# Altium PCB CT9042 Front Board.PcbDoc (part 1 of 2)
Units mm, origin at the board's own origin, x right, y up, seen from the top; angles counter-clockwise.
Board outline 238.25 x 69.25 mm, 4 copper layers (Top Layer, Layer 1, Layer 2, Bottom Layer), stack 1.794 mm thick; 120 components, 105 nets, 430 pads, 140 vias.
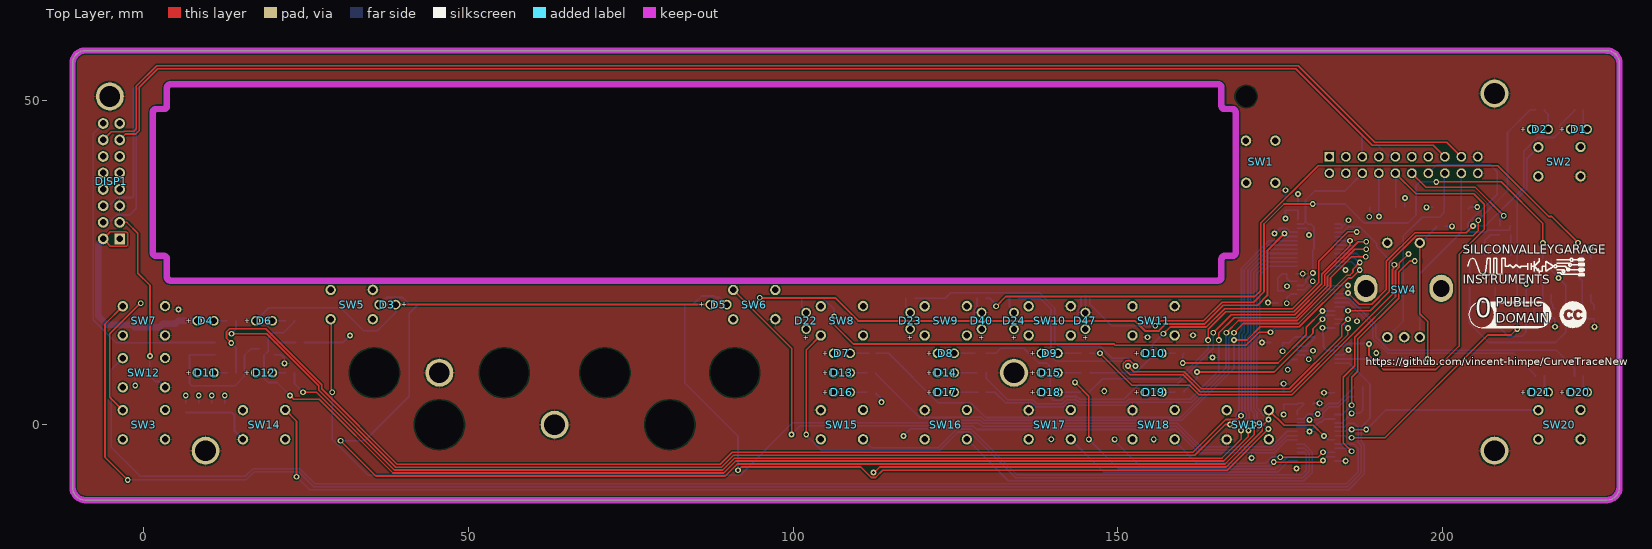
[diagram p0: Top Layer view]
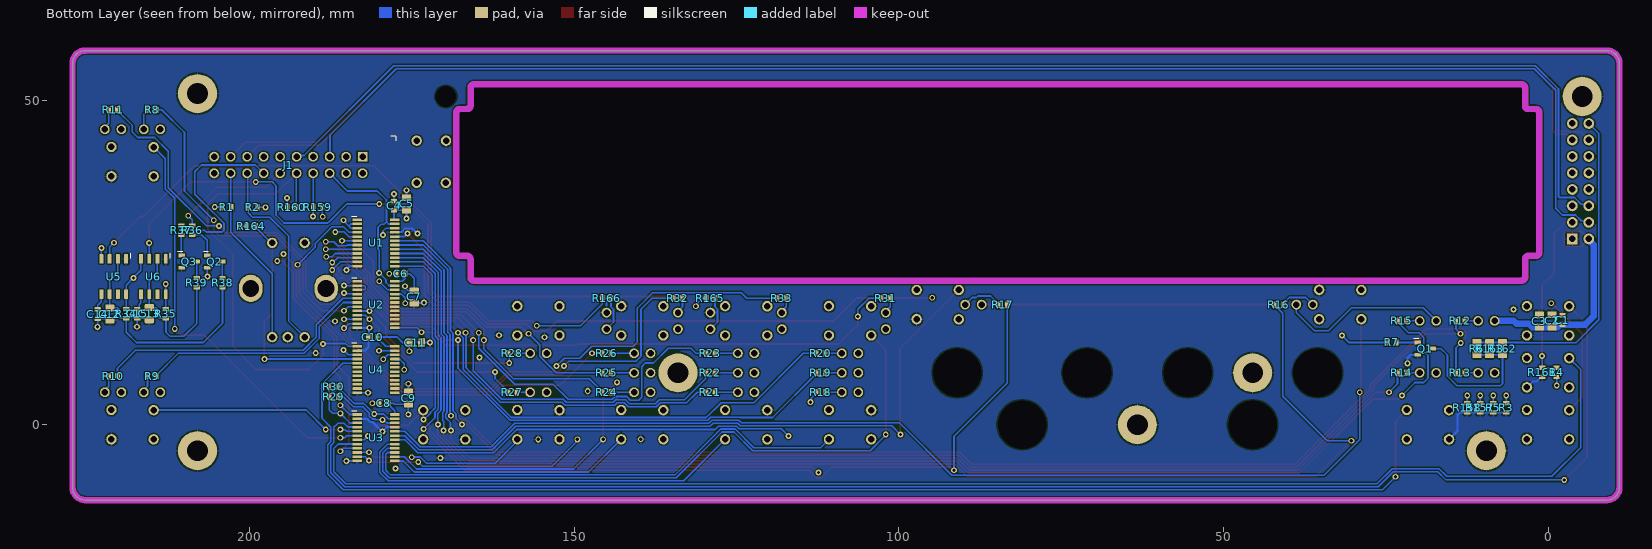
[diagram p1: Bottom Layer view, seen from below]
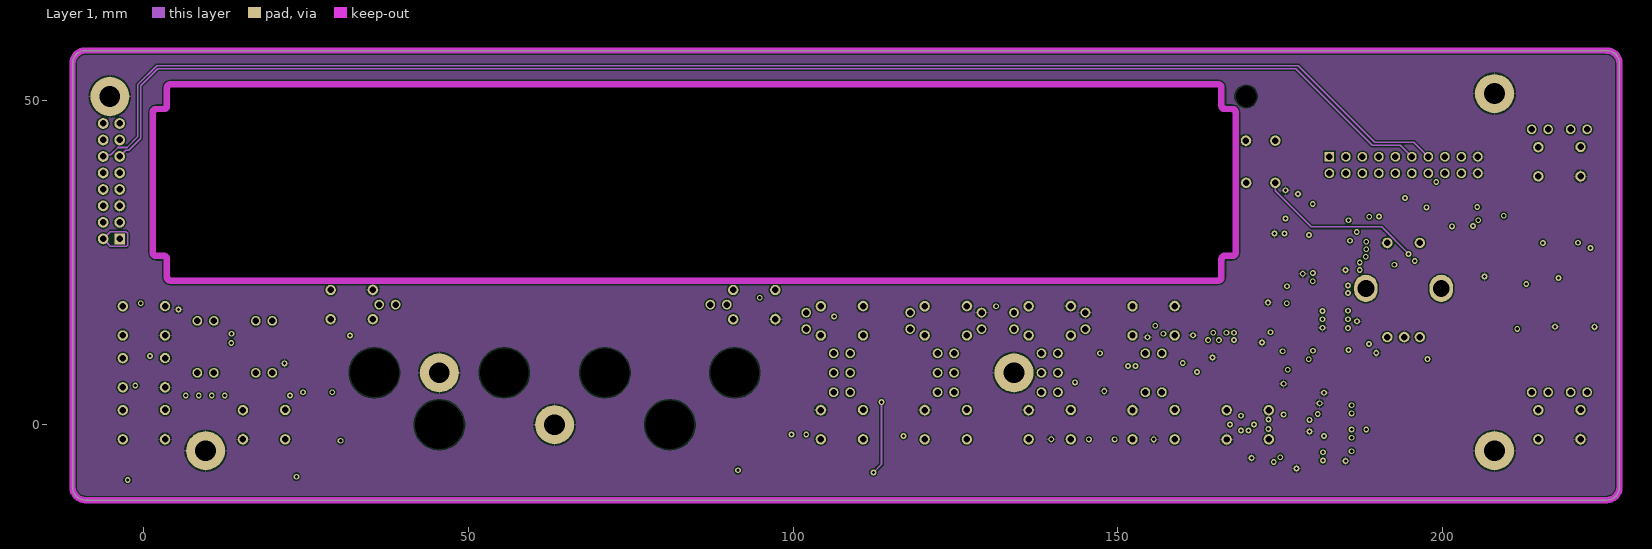
[diagram p2: Layer 1]
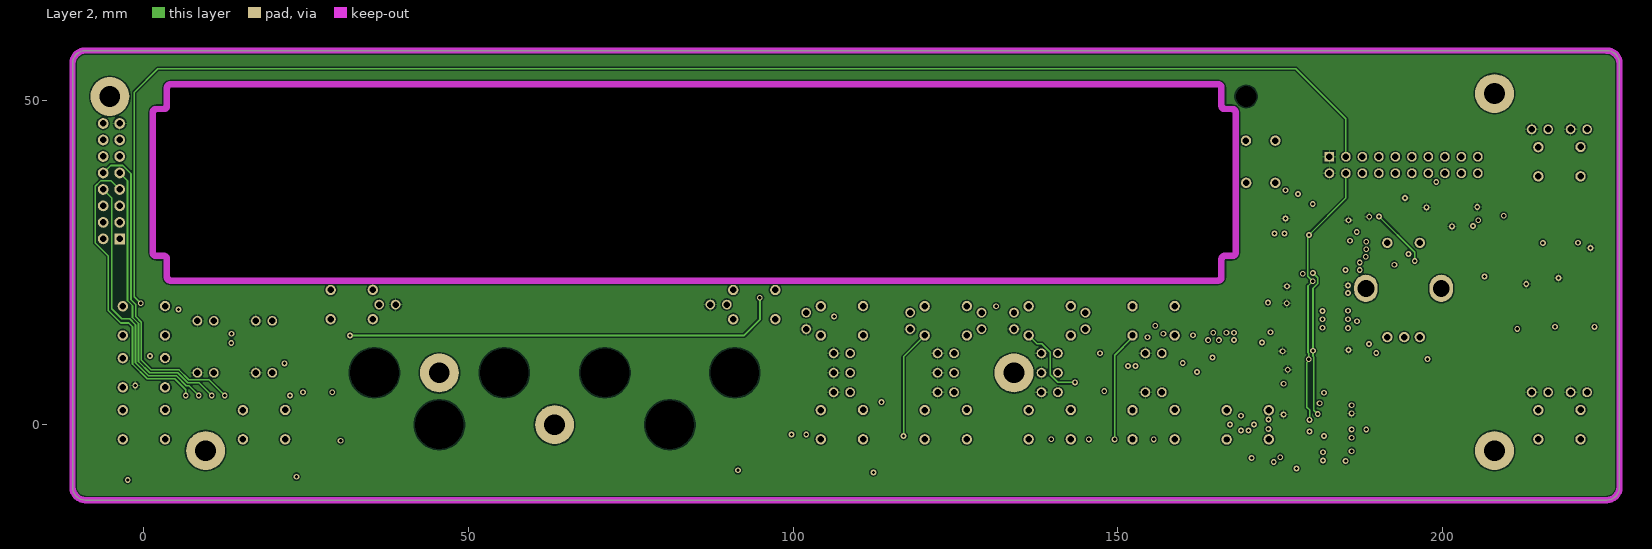
[diagram p3: Layer 2]
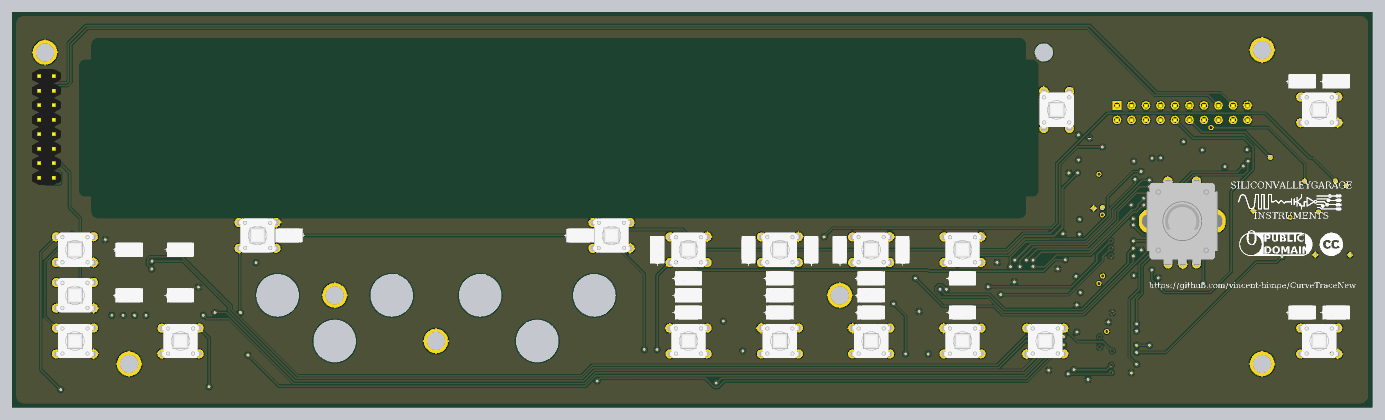
[diagram p5: 3D render of the assembled board from above, using the file's embedded part models]
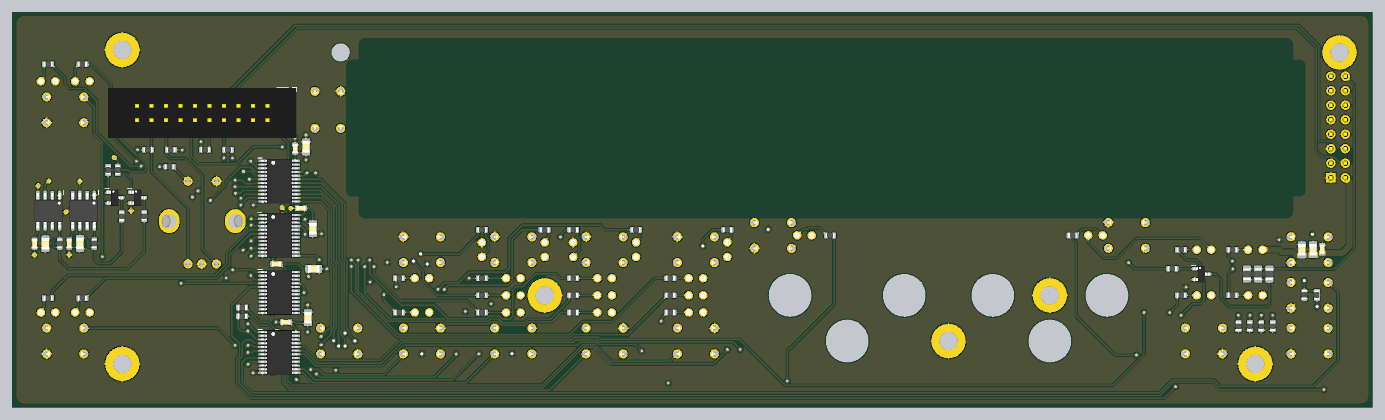
[diagram p6: 3D render of the assembled board from below, using the file's embedded part models]

## Layer stack, top to bottom
Top Solder: solder mask 0.0102, Solder Resist, Dk 3.5
Top Layer: signal copper 0.0356
Dielectric 2: prepreg 0.1016, Core-009, Dk 4.5
Layer 1: signal copper 0.035
Dielectric 1: dielectric 1.45, FR-4, Dk 4.8
Layer 2: signal copper 0.035
Dielectric 3: prepreg 0.1016, Core-009, Dk 4.5
Bottom Layer: signal copper 0.0356
Bottom Solder: solder mask 0.0102, Solder Resist, Dk 3.5

## Board outline
-10.662,-10.727 -10.847,-10.381 -10.96,-10.006 -10.999,-9.616 -10.999,55.634 -10.96,56.024 -10.847,56.399 -10.662,56.745 -10.413,57.048 -10.11,57.297 -9.764,57.482 -9.389,57.596 -8.999,57.634 225.251,57.634 225.641,57.596 226.016,57.482 226.362,57.297 226.665,57.048 226.914,56.745 227.099,56.399 227.213,56.024 227.251,55.634 227.251,-9.616 227.213,-10.006 227.099,-10.381 226.914,-10.727 226.665,-11.03 226.362,-11.279 226.016,-11.464 225.641,-11.578 225.251,-11.616 -8.999,-11.616 -9.389,-11.578 -9.764,-11.464 -10.11,-11.279 -10.413,-11.03
cut-out: 3.551,22.709 3.55,25.493 ccw(c3.05,25.493) 3.05,25.993 1.875,25.993 cw(c1.875,26.493) 1.375,26.493 1.375,48.125 cw(c1.875,48.125) 1.875,48.625 3.05,48.625 ccw(c3.05,49.125) 3.55,49.125 3.55,51.909 3.551,51.909 cw(c4.051,51.909) 4.051,52.409 165.451,52.409 cw(c165.451,51.909) 165.951,51.909 165.952,51.909 165.952,49.125 ccw(c166.452,49.125) 166.452,48.625 167.627,48.625 cw(c167.627,48.125) 168.127,48.125 168.127,26.493 cw(c167.627,26.493) 167.627,25.993 166.452,25.993 ccw(c166.452,25.493) 165.952,25.493 165.952,22.709 165.951,22.709 cw(c165.451,22.709) 165.451,22.209 4.051,22.209 cw(c4.051,22.709)

## Design rules (kind name [scope] priority, off if disabled: settings)
Clearance [All] p1: gap=0.2 ignorepadtopadclearanceinfootprint=FALSE
ComponentClearance [All] p1 off: gap=0.254 collisioncheckmode=3 verticalgap=0.254 showdistances=FALSE
Height [All] p1 off: minheight=0 maxheight=25.4 prefheight=12.7
HoleSize [All] p1: absolutevalues=TRUE maxlimit=10 minlimit=0.1 maxpercent=80.000 minpercent=20.000
MinimumSolderMaskSliver [All] p1: minsoldermaskwidth=0.1
PolygonConnect [All] p1: connectstyle=Relief reliefconductorwidth=0.254 reliefentries=4 polygonreliefangle="90 Angle" airgapwidth=0.254
RoutingVias [All] p1: holewidth=0.5 width=0.9 viastyle="Through Hole" minholewidth=0.5 minwidth=0.9 maxholewidth=0.5 maxwidth=0.9
SolderMaskExpansion [All] p1: expansion=0.102 istentingtop=FALSE
SupplyNets "Schematic Supply Nets" [InNet('FGND')] p1: voltage=0.000
SupplyNets "Schematic Supply Nets_1" [InNet('FP5VD')] p2: voltage=0.000
Width [All] p1: maxlimit=2 minlimit=0.2 preferedwidth=0.25
26 further rules are at their usual default settings.

## Components (designator, comment, footprint, x,y, rotation, side; value= is the part's Value field where it differs from the comment)
C1 "CAP0603" CAPC0603 -2.22,16.12 r90 bottom
C2 "CAP0805" CAPC0805 -0.625,16 r90 bottom
C3 "CAP0805" CAPC0805 1.35,15.975 r90 bottom
C4 "CAP0603" CAPC0603 177.737,33.71 r90 bottom
C5 "CAP0805" CAPC0805 175.807,34 r90 bottom
C6 "CAP0603" CAPC0603 176.7,23.275 r0 bottom
C7 "CAP0805" CAPC0805 174.625,19.675 r270 bottom
C8 "CAP0603" CAPC0603 179.326,3.302 r0 bottom
C9 "CAP0805" CAPC0805 175.49,4.09 r90 bottom
C10 "CAP0603" CAPC0603 181,13.5 r0 bottom
C11 "CAP0805" CAPC0805 174.454,12.648 r180 bottom
C12 "CAP0805" CAPC0805 221.5,17.05 r270 bottom
C13 "CAP0805" CAPC0805 215.425,17.1 r270 bottom
C14 "CAP0603" CAPC0603 223.375,17.05 r270 bottom
C15 "CAP0603" CAPC0603 217.3,17.075 r270 bottom
D1 "LED-SUNLED-XLUY13D" LED-SUNLED-XLUY13D 221,45.5 r0 top locked
D2 "LED-SUNLED-XLUY13D" LED-SUNLED-XLUY13D 215,45.5 r0 top locked
D3 "LED-SUNLED-XLUY13D" LED-SUNLED-XLUY13D 37.5,18.5 r180 top locked
D4 "LED-SUNLED-XLUY13D" LED-SUNLED-XLUY13D 9.5,16 r0 top locked
D5 "LED-SUNLED-XLUY13D" LED-SUNLED-XLUY13D 88.5,18.5 r0 top locked
D6 "LED-SUNLED-XLUY13D" LED-SUNLED-XLUY13D 18.5,16 r0 top locked
D7 "LED-SUNLED-XLUY13D" LED-SUNLED-XLUY13D 107.5,11 r0 top locked
D8 "LED-SUNLED-XLUY13D" LED-SUNLED-XLUY13D 123.5,11 r0 top locked
D9 "LED-SUNLED-XLUY13D" LED-SUNLED-XLUY13D 139.5,11 r0 top locked
D10 "LED-SUNLED-XLUY13D" LED-SUNLED-XLUY13D 155.5,11 r0 top locked
D11 "LED-SUNLED-XLUY13D" LED-SUNLED-XLUY13D 9.5,8 r0 top locked
D12 "LED-SUNLED-XLUY13D" LED-SUNLED-XLUY13D 18.5,8 r0 top locked
D13 "LED-SUNLED-XLUY13D" LED-SUNLED-XLUY13D 107.5,8 r0 top locked
D14 "LED-SUNLED-XLUY13D" LED-SUNLED-XLUY13D 123.5,8 r0 top locked
D15 "LED-SUNLED-XLUY13D" LED-SUNLED-XLUY13D 139.5,8 r0 top locked
D16 "LED-SUNLED-XLUY13D" LED-SUNLED-XLUY13D 107.5,5 r0 top locked
D17 "LED-SUNLED-XLUY13D" LED-SUNLED-XLUY13D 123.5,5 r0 top locked
D18 "LED-SUNLED-XLUY13D" LED-SUNLED-XLUY13D 139.5,5 r0 top locked
D19 "LED-SUNLED-XLUY13D" LED-SUNLED-XLUY13D 155.5,5 r0 top locked
D20 "LED-SUNLED-XLUY13D" LED-SUNLED-XLUY13D 221,5 r0 top locked
D21 "LED-SUNLED-XLUY13D" LED-SUNLED-XLUY13D 215,5 r0 top locked
D22 "LED-SUNLED-XLUY13D" LED-SUNLED-XLUY13D 102,16 r90 top locked
D23 "LED-SUNLED-XLUY13D" LED-SUNLED-XLUY13D 118,16 r90 top locked
D24 "LED-SUNLED-XLUY13D" LED-SUNLED-XLUY13D 134,16 r90 top locked
D40 "LED-SUNLED-XLUY13D" LED-SUNLED-XLUY13D 129,16 r90 top locked
D47 "LED-SUNLED-XLUY13D" LED-SUNLED-XLUY13D 145,16 r90 top locked
DISP1 "DISPLAY-LCD-2X40" CONNECTOR-GENERIC-PINHEADER-2X8 -5,37.5 r90 top
J1 "BOXHEADER-10X2" "CONNECTOR GENERIC-BOXHEADER-2X10" 194,40 r270 bottom
Q1 "MMBT2222" SOT23 18.925,11.725 r180 bottom
Q2 "MMBT2222" SOT23 205.325,25.125 r180 bottom
Q3 "MMBT2222" SOT23 209.3,25.125 r180 bottom
R1 "RESC0603" RESC0603 203.5,33.5 r0 bottom value=10K
R2 "RESC0603" RESC0603 199.5,33.5 r180 bottom value=10K
R3 "RESC0603" RESC0603 6.45,2.6 r270 bottom value=470R
R4 "RESC0603" RESC0603 -1.3,8.075 r270 bottom value=10K
R5 "RESC0603" RESC0603 8.45,2.6 r270 bottom value=470R
R6 "RESC0805" RESC0805 10.95,11.725 r90 bottom
R7 "RESC0603" RESC0603 24.05,12.675 r0 bottom value=1K
R8 "RESC0603" RESC0603 215,48.5 r180 bottom value=470R
R9 "RESC0603" RESC0603 215,7.5 r180 bottom value=470R
R10 "RESC0603" RESC0603 221,7.5 r180 bottom value=470R
R11 "RESC0603" RESC0603 221,48.5 r180 bottom value=470R
R12 "RESC0603" RESC0603 13.5,16 r0 bottom value=470R
R13 "RESC0603" RESC0603 13.5,8 r0 bottom value=470R
R14 "RESC0603" RESC0603 22.5,8 r0 bottom value=470R
R15 "RESC0603" RESC0603 22.5,16 r0 bottom value=470R
R16 "RESC0603" RESC0603 41.5,18.5 r0 bottom value=470R
R17 "RESC0603" RESC0603 84,18.5 r180 bottom value=470R
R18 "RESC0603" RESC0603 112,5 r0 bottom value=470R
R19 "RESC0603" RESC0603 112,8 r0 bottom value=470R
R20 "RESC0603" RESC0603 112,11 r0 bottom value=470R
R21 "RESC0603" RESC0603 129,5 r0 bottom value=470R
R22 "RESC0603" RESC0603 129,8 r0 bottom value=470R
R23 "RESC0603" RESC0603 129,11 r0 bottom value=470R
R24 "RESC0603" RESC0603 145,5 r0 bottom value=470R
R25 "RESC0603" RESC0603 145,8 r0 bottom value=470R
R26 "RESC0603" RESC0603 145,11 r0 bottom value=470R
R27 "RESC0603" RESC0603 159.5,5 r0 bottom value=470R
R28 "RESC0603" RESC0603 159.5,11 r0 bottom value=470R
R29 "RESC0603" RESC0603 187,4.325 r0 bottom value=10K
R30 "RESC0603" RESC0603 187,5.875 r0 bottom value=10K
R31 "RESC0603" RESC0603 102,19.5 r0 bottom value=470R
R32 "RESC0603" RESC0603 134,19.5 r0 bottom value=470R
R33 "RESC0603" RESC0603 118,19.5 r0 bottom value=470R
R34 "RESC0603" RESC0603 218.975,17.075 r90 bottom value=10K
R35 "RESC0603" RESC0603 212.9,17.075 r90 bottom value=10K
R36 "RESC0603" RESC0603 208.825,29.975 r90 bottom value=470R
R37 "RESC0603" RESC0603 210.475,29.95 r90 bottom value=470R
R38 "RESC0603" RESC0603 204.15,21.875 r270 bottom value=470R
R39 "RESC0603" RESC0603 208.125,21.85 r270 bottom value=470R
R157 "RESC0603" RESC0603 10.45,2.6 r270 bottom value=470R
R158 "RESC0603" RESC0603 12.45,2.6 r270 bottom value=470R
R159 "RESC0603" RESC0603 189.5,33.5 r180 bottom value=10K
R160 "RESC0603" RESC0603 193.5,33.5 r0 bottom value=10K
R161 "RESC0603" RESC0603 0.9,8.1 r90 bottom value=470R
R162 "RESC0805" RESC0805 7.025,11.725 r90 bottom
R163 "RESC0805" RESC0805 9,11.725 r90 bottom
R164 "RESC0603" RESC0603 199.725,30.55 r0 bottom value=10K
R165 "RESC0603" RESC0603 129,19.5 r0 bottom value=470R
R166 "RESC0603" RESC0603 145,19.5 r0 bottom value=470R
SW1 "SWITCH-E-SWITCH-TL1105SFP" SWITCH-ESWITCH-TL1105SPF-1RCAP 172,40.5 r90 top
SW2 "SWITCH-E-SWITCH-TL1105SFP" SWITCH-ESWITCH-TL1105SPF-1RCAP 218,40.5 r0 top locked
SW3 "SWITCH-E-SWITCH-TL1105SFP" SWITCH-ESWITCH-TL1105SPF-1RCAP 0.001,0 r0 top
SW4 "PEC12R-XX" SWITCH-BOURNS-PEC12R-4120F-S0012 194,21 r0 top locked
SW5 "SWITCH-E-SWITCH-TL1105SFP" SWITCH-ESWITCH-TL1105SPF-1RCAP 32,18.5 r0 top locked
SW6 "SWITCH-E-SWITCH-TL1105SFP" SWITCH-ESWITCH-TL1105SPF-1RCAP 94,18.5 r180 top locked
SW7 "SWITCH-E-SWITCH-TL1105SFP" SWITCH-ESWITCH-TL1105SPF-1RCAP 0,16 r0 top locked
SW8 "SWITCH-E-SWITCH-TL1105SFP" SWITCH-ESWITCH-TL1105SPF-1RCAP 107.5,16 r0 top locked
SW9 "SWITCH-E-SWITCH-TL1105SFP" SWITCH-ESWITCH-TL1105SPF-1RCAP 123.5,16 r0 top locked
SW10 "SWITCH-E-SWITCH-TL1105SFP" SWITCH-ESWITCH-TL1105SPF-1RCAP 139.5,16 r0 top locked
SW11 "SWITCH-E-SWITCH-TL1105SFP" SWITCH-ESWITCH-TL1105SPF-1RCAP 155.5,16 r0 top locked
SW12 "SWITCH-E-SWITCH-TL1105SFP" SWITCH-ESWITCH-TL1105SPF-1RCAP 0,8 r0 top locked
SW14 "SWITCH-E-SWITCH-TL1105SFP" SWITCH-ESWITCH-TL1105SPF-1RCAP 18.5,0 r0 top locked
SW15 "SWITCH-E-SWITCH-TL1105SFP" SWITCH-ESWITCH-TL1105SPF-1RCAP 107.5,0 r0 top locked
SW16 "SWITCH-E-SWITCH-TL1105SFP" SWITCH-ESWITCH-TL1105SPF-1RCAP 123.5,0 r0 top locked
SW17 "SWITCH-E-SWITCH-TL1105SFP" SWITCH-ESWITCH-TL1105SPF-1RCAP 139.5,0 r0 top locked
SW18 "SWITCH-E-SWITCH-TL1105SFP" SWITCH-ESWITCH-TL1105SPF-1RCAP 155.5,0 r0 top locked
SW19 "SWITCH-E-SWITCH-TL1105SFP" SWITCH-ESWITCH-TL1105SPF-1RCAP 170,0 r180 top locked
SW20 "SWITCH-E-SWITCH-TL1105SFP" SWITCH-ESWITCH-TL1105SPF-1RCAP 218,0 r0 top locked
U1 "PCAL9555" SO65P640X120-24N 180.5,28 r180 bottom
U2 "PCAL9555" SO65P640X120-24N 180.5,18.5 r180 bottom
U3 "PCAL9555" SO65P640X120-24N 180.5,-2 r180 bottom locked
U4 "PCAL9555" SO65P640X120-24N 180.5,8.5 r180 bottom
U5 "TLC555" SO127P600-8N 220.9,22.825 r270 bottom
U6 "TLC555" SO127P600-8N 214.8,22.825 r270 bottom

## Footprints (in the part's own frame and the unit in brackets; to place one, negate y for a bottom-side part, rotate by r counter-clockwise, add the part's x,y. Pads: shape width x height; smd on the part's side, far side on the other; paste and mask are expansions set on the pad)
CAPC0603 [mm] "CAPACITOR, CHIP 0603 (1608) 0.5MM THICK"
  rrect25% 0.72x0.99 smd paste+0 mask+0.075: 1(-0.69,0) 2(0.69,0)
  body extent -0.81,-0.41 0.81,0.41, height 0.51
CAPC0805 [mm] "CAPACITOR, CHIP 0805 (2012) 0.85MM THICK"
  rrect25% 1.05x1.4 smd paste+0 mask+0.075: 1(-0.95,0) 2(0.95,0)
  body extent -1.01,-0.63 1.01,0.64, height 0.86
"CONNECTOR GENERIC-BOXHEADER-2X10" [mm] "CONNECTOR GENERIC-BOXHEADER-2X10"
  rect 1.5x1.5 hole 1 mask+0.075: 1(-1.27,11.43)
  round 1.5 hole 1 mask+0.075: 2(1.27,11.43) 3(-1.27,8.89) 4(1.27,8.89) 5(-1.27,6.35) 6(1.27,6.35) 7(-1.27,3.81) 8(1.27,3.81) 9(-1.27,1.27) 10(1.27,1.27) 11(-1.27,-1.27) 12(1.27,-1.27) 13(-1.27,-3.81) 14(1.27,-3.81) 15(-1.27,-6.35) 16(1.27,-6.35) 17(-1.27,-8.89) 18(1.27,-8.89) 19(-1.27,-11.43) 20(1.27,-11.43)
  silkscreen extent -4.45,15.76 -3.7,16.51, body extent -4.45,-16.51 4.45,16.51, height 8.81
CONNECTOR-GENERIC-PINHEADER-2X8 [mm] "CONNECTOR GENERIC-PINHEADER-2X8"
  rect 1.65x1.65 hole 1 mask+0.1: 1(-8.883,-1.258)
  round 1.65 hole 1 mask+0.1: 2(-8.883,1.282) 3(-6.343,-1.258) 4(-6.343,1.282) 5(-3.803,-1.258) 6(-3.803,1.282) 7(-1.263,-1.258) 8(-1.263,1.282) 9(1.277,-1.258) 10(1.277,1.282) 11(3.817,-1.258) 12(3.817,1.282) 13(6.357,-1.258) 14(6.357,1.282) 15(8.897,-1.258) 16(8.897,1.282)
  body extent -10.16,-2.54 10.16,2.54, height 9.26
LED-SUNLED-XLUY13D [mm] "LED.YELLOW,DIFFUSED,FLAT TOP,2MM LENS,RECTANGLE BODY"
  round 1.5 hole 1: 1(1.27,0) 2(-1.27,0)
  body extent -2.4,-1.26 2.4,1.25, height 10.05
RESC0603 [mm] "RESISTOR, CHIP 0603 (1608)"
  rrect25% 0.72x0.99 smd paste+0 mask+0.075: 1(-0.69,0) 2(0.69,0)
  body extent -0.8,-0.4 0.8,0.4, height 0.37
RESC0805 [mm] "RESISTOR, CHIP 0805 (2012)"
  rrect25% 1.05x1.4 smd paste+0 mask+0.075: 1(-0.95,0) 2(0.95,0)
  body extent -1,-0.63 1,0.63, height 0.47
SO65P640X120-24N [mm] "TSSOP24 , 6.4MM TTT  0.65MM PITCH"
  rrect25% 1.45x0.396 smd mask+0.075: 1(-2.9,3.575) 2(-2.9,2.925) 3(-2.9,2.275) 4(-2.9,1.625) 5(-2.9,0.975) 6(-2.9,0.325) 7(-2.9,-0.325) 8(-2.9,-0.975) 9(-2.9,-1.625) 10(-2.9,-2.275) 11(-2.9,-2.925) 12(-2.9,-3.575) 13(2.9,-3.575) 14(2.9,-2.925) 15(2.9,-2.275) 16(2.9,-1.625) 17(2.9,-0.975) 18(2.9,-0.325) 19(2.9,0.325) 20(2.9,0.975) 21(2.9,1.625) 22(2.9,2.275) 23(2.9,2.925) 24(2.9,3.575)
  silkscreen extent -3.73,4.05 -2.98,4.05, body extent -3.2,-3.9 3.2,3.9, height 1.21
SO127P600-8N [mm] "SO8"
  rrect25% 1.45x0.6 smd mask+0.075: 1(-2.725,1.905) 2(-2.725,0.635) 3(-2.725,-0.635) 4(-2.725,-1.905) 5(2.725,-1.905) 6(2.725,-0.635) 7(2.725,0.635) 8(2.725,1.905)
  silkscreen extent -3.55,2.63 -2.8,2.63, body extent -3.1,-2.5 3.1,2.5, height 1.75
SOT23 [mm] "SOT23 PACKAGE, 3 PIN"
  rrect25% 1x0.6 smd paste+0 mask+0.075: 1(-1.15,0.95) 2(-1.15,-0.95) 3(1.15,0)
  silkscreen extent -1.75,1.55 -1,1.55, body extent -1.4,-1.45 1.4,1.45, height 1.3
SWITCH-BOURNS-PEC12R-4120F-S0012 [mm] "SWITCH,ROTATRY+CLICK,20MM AXLE"
  round 1.6 hole 1: 1(-2.5,7) 2(2.5,7) A(-2.5,-7.5) B(2.5,-7.5) C(0.1,-7.5)
  oval 3.6x4.2 hole 2.6: M1(5.8,0) M2(-5.8,0)
  body extent -7,-7.6 7,7.15, height 20.01
SWITCH-ESWITCH-TL1105SPF-1RCAP [mm] "SWTICH,TACT,MOM,WITH 1R CAP,E-SWITCH TL1105SP"
  round 1.6 hole 1: 1(-3.25,-2.25) 2(3.25,-2.25) 3(-3.25,2.25) 4(3.25,2.275)
  body extent -3.94,-3 3.94,3, height 13.5

## Part data
C1 C4 C6 C8 C10 C14 C15: library part CAPC-0603-100nF-50V-X7R, "CAPACITOR,CERAMIC,100nF,50V,X7R,0603", Capacitance=100nF, Dielectric=X7R, LCSC=C127833, Manufacturer 1=KEMET, Manufacturer Part Number 1=C0603C104K5RACTU, Package / Case=0603, Supplier Part Number 1=80-C0603C104K5R7867, Voltage=50V, MOUSER=80-C0603C104K5R, Supplier 1=Mouser, Supplier 2=Mouser, Supplier 3=Avnet, Supplier 4=Digikey, Supplier Part Number 2=80-C0603C104K5R7411, Supplier Part Number 3=KGM15BR71H104KT, Supplier Part Number 4=1276-1000-1-ND
C2 C3 C5 C7 C9 C11 C12 C13: library part CAPC-0805-10uF-25V, "CAPACITOR,CERAMIC,10uF,25V,X5R,0805", Capacitance=10uF, Dielectric=X7R, LCSC=C3039694, Manufacturer 1=SAMSUNG, Manufacturer Part Number 1=CL21B106KAYQNNE, Package / Case="0805 (2012 metric)", Voltage=25V, MOUSER=187-CL21B106KAYQNNE
D1 D2 D3 D4 D5 D6 D7 D8 D9 D10 D11 D12 D13 D14 D15 D16 D17 D18 D19 D20 D21 D22 D23 D24 D40 D47: "LED,TH,GREEN,42mCd,2mm PINMOUNT", Manufacturer 1=SUNLED, Manufacturer Part Number 1=XLUY13D, DIGIKEY=XLUY13D-ND, MOUSER=78-VLMPG33N1P2
DISP1: "DISPLAY,LCD,ALPHA,2X40CHAR,HD44780,YELLOW BL"
J1: library part CONN-BOXHEADER-10X2
Q1 Q2 Q3: library part XSTR-NPN-MMBT2222, "XSTR,NPN,40V,0.6A,,MMBT2222,SOT23", LCSC=C8512
R1 R2 R4 R29 R30 R34 R35 R159 R160 R164: library part RESC-0603-10K-1%-1/10W, "RESISTOR,10K,1%,100mW,0603 (1608)", LCSC=C25804, Manufacturer 1=YAGEO, Manufacturer Part Number 1=RC0603FR-0710KL, Power=1/10W, Tolerance=1%, MOUSER=603-RC0603FR-0710KL
R3 R5 R8 R9 R10 R11 R12 R13 R14 R15 R16 R17 R18 R19 R20 R21 R22 R23 R24 R25 R26 R27 R28 R31 R32 R33 R36 R37 R38 R39 R157 R158 R161 R165 R166: library part RESC-0603-470R-1%-1/10W, "RESISTOR,470R,1%,100mW,0603 (1608)", LCSC=C23179, Power=1/10W, Tolerance=1%
R6 R162 R163: library part RESC-0805-GENERIC, "RESISTOR,GENERIC,0805"
R7: library part RESC-0603-1K-1%-1/10W, "RESISTOR,1K,1%,100mW,0603 (1608)", LCSC=C21190, Manufacturer 1=YAGEO, Manufacturer Part Number 1=RC0603FR-071KL, Power=1/10W, Tolerance=1%, MOUSER=603-RC0603FR-071KL
SW1 SW2 SW3 SW5 SW6 SW7 SW8 SW9 SW10 SW11 SW12 SW14 SW15 SW16 SW17 SW18 SW19 SW20: "SW,SMD,TACT,4PIN,TH,160g TOP ACTUATOR FOR CAP,E-SWITCH,TL1105SPF160", Manufacturer 1=E-SWITCH, Manufacturer Part Number 1=TL1105SPF160Q, DIGIKEY=EG1861-ND
SW4: library part SWITCH-BOURNS-PEC12R-4120F-S0012, "SWITCH,ENCODER+CLICK,BOURNS,PEC12R-4120F-S0012", Manufacturer 1=BOURNS, Manufacturer Part Number 1=PEC12R-4120F-S0012
U1 U2 U3 U4: library part IC-NEXPERIA-PCAL9555A, "I2C,16BIT AGILE I/O EXPANDER,INT,NEXPERIA,PCAL95555,TSSOP24", LCSC=C2669740, Manufacturer 1=NEXPERIA, Manufacturer Part Number 1=PCAL9555APW,118, DIGIKEY=568-9928-1-ND
U5 U6: library part IC-TI-TLC555-SO8, "IC,TIMER,CMOSE,TI,TLC555,SO8", LCSC=C6987, Manufacturer 1=TI, Manufacturer Part Number 1=TLC555IDR

## Free pads (board coordinates)
  round 4.3 / inner round 6 / far side round 6 hole 3.2 paste-2539.97 mask+0.1: 11(-5.249,50.559) 12(9.5,-4) 12(45.5,8) 12(63.251,0) 12(134,8) 12(208,-4) 12(208,51)
  round 0 hole 3.2 paste-2539.97 mask-1: 12(169.751,50.559)
  round 0 hole 7.5 unplated: M3(35.5,8) M3(45.5,0) M3(55.5,8) M3(71,8) M3(81,0) M3(91,8)

## Via types
v1: diameter 0.9, hole 0.5, Top Layer to Bottom Layer, tented both sides, 123 vias
v2: diameter 0.9, hole 0.5, Top Layer to Bottom Layer, 17 vias

## Nets (pads, with @x,y where several pads share a name; then routed paths per layer and width w, separated by ;. In a path a pad name is that pad's centre, name@x,y a point inside that pad or via, vN(x,y) a via of type N, cw(c..) or ccw(c..) an arc to the next point about the centre after c; other vN are vias at no path point)
BTN-ALTERNATE: SW11.1 U3.11 | length 53.5
  Top Layer w0.254: v1(174,-5.75) 174.027,-5.777 181.148,-5.777 181.4,-5.525 v1(181.575,-5.525)
  Layer 2 w0.254: v1(149.5,-2.25) 149.5,10.701 152.25,13.451 SW11.1@152.25,13.75
  Bottom Layer w0.254: v1(149.5,-2.25) 149.5,-2.425 149.709,-2.633 149.709,-2.709 153.368,-6.368 173.382,-6.368 v1(174,-5.75) ; v1(181.575,-5.525) 182.175,-4.925 U3.11@183.4,-4.925
BTN-BIPFET: SW7.3 U3.4 | length 233.1
  Top Layer w0.254: SW7.3@-3.25,18.25 -6,15.5 -6,-5 v1(-2.5,-8.5)
  Bottom Layer w0.254: v1(-2.5,-8.5) 15.711,-8.5 16.988,-7.223 23.831,-7.223 26.154,-9.546 34.986,-9.546 185.346,-9.546 187.5,-7.392 187.5,-3.25 187,-2.75 187,-0.375 186.375,0.25 185.45,0.25 184.854,-0.346 183.429,-0.346 U3.4@183.4,-0.375
BTN-CHA: SW5.1 U3.20 | length 175.7
  Top Layer w0.254: SW5.1@28.751,16.259 28.876,16.134 v1@28.876,5
  Bottom Layer w0.254: v1(29,5) 29,-2.276 34.501,-7.777 91.822,-7.777 99.895,0.296 124.228,0.296 124.625,0.693 128.773,0.693 129.251,0.215 159.163,0.215 162.78,-3.402 173.692,-3.402 176.069,-1.025 U3.20@177.6,-1.025
BTN-CHB: SW6.2 U3.19 | length 107.2
  Top Layer w0.254: SW6.2@90.751,20.759 90.751,20.749 99.75,11.75 v1(99.75,-1.5)
  Bottom Layer w0.254: v1(99.75,-1.5) 101.092,-0.158 124.416,-0.158 124.813,0.239 128.585,0.239 129.063,-0.239 158.975,-0.239 162.592,-3.856 173.88,-3.856 176.061,-1.675 U3.19@177.6,-1.675
BTN-DUTAB: SW20.3 U3.5 | length 32.7
  Top Layer w0.254: v1(186,-0.75) v1(188.25,-0.75)
  Bottom Layer w0.254: U3.5@183.4,-1.025 185,-1.025 185.275,-0.75 v1(186,-0.75) ; v1(188.25,-0.75) 191.259,2.259 SW20.3@214.751,2.259
BTN-IMAXDN: SW16.2 U3.17 | length 62.3
  Bottom Layer w0.254: SW16.2@126.75,-2.25 133.138,-8.638 178.646,-8.638 179.908,-7.376 179.908,-4.158 178.738,-2.988 177.613,-2.988 U3.17@177.6,-2.975
BTN-IMAXUP: SW9.1 U3.18 | length 80.6
  Layer 2 w0.254: v1(117,-1.731) 117,10.5 SW9.1@120.25,13.75
  Bottom Layer w0.254: v1(117,-1.731) 118.119,-0.612 124.604,-0.612 125.001,-0.215 127.761,-0.215 128.271,-0.725 137.834,-0.725 138.69,-0.725 158.819,-0.725 162.404,-4.31 174.068,-4.31 176.053,-2.325 U3.18@177.6,-2.325
BTN-MARK12: SW2.3 U3.6 | length 64.5
  Top Layer w0.254: v1(186,-2) 191.125,-2 206.948,13.823 210.554,13.823 v1(211.5,14.769)
  Bottom Layer w0.254: U3.6@183.4,-1.675 185.025,-1.675 185.341,-1.991 185.991,-1.991 v1(186,-2) ; v1(211.5,14.769) 211.5,34.858 212.954,36.312 212.954,40.97 SW2.3@214.752,42.768
BTN-NPN-PNP: SW12.3 U3.8 | length 218
  Bottom Layer w0.254: SW12.3@-3.25,10.25 -5.008,8.492 -5.008,-3.517 -0.575,-7.95 15.619,-7.95 16.8,-6.769 24.019,-6.769 26.342,-9.092 35.174,-9.092 185.158,-9.092 187,-7.25 187,-3.651 186.322,-2.973 185.161,-2.973 185.159,-2.975 U3.8@183.4,-2.975
BTN-PAGE: SW1.1 U3.9 | length 63.6
  Top Layer w0.254: v1(186,-4.075) 184.725,-2.8 184.725,7.3 186.49,9.065 186.49,13.49 192.75,19.75 192.75,23.726 193.352,24.328 193.352,24.902 v1(194.75,26.3)
  Layer 1 w0.254: SW1.1@174.25,37.25 174.25,36.012 179.785,30.477 190.617,30.477 194.75,26.344 v1(194.75,26.3)
  Bottom Layer w0.254: U3.9@183.4,-3.625 185.55,-3.625 v1(186,-4.075)
BTN-PMAXDN: SW17.2 U3.13 | length 37.6
  Bottom Layer w0.254: SW17.2@142.75,-2.25 147.776,-7.276 174.616,-7.276 176.317,-5.575 U3.13@177.6,-5.575
BTN-PMAXUP: SW10.1 U3.14 | length 56.6
  Top Layer w0.254: v1(143.4,6.525) 145.525,4.4 v1(145.525,-2.25)
  Layer 2 w0.254: SW10.1@136.25,13.75 137.531,12.469 138.284,12.469 139.571,11.182 139.571,7.676 140.722,6.525 v1(143.4,6.525)
  Bottom Layer w0.254: v1(145.525,-2.25) 150.097,-6.822 174.277,-6.822 176.174,-4.925 U3.14@177.6,-4.925
BTN-ROTCLICK: R164.1 SW4.2 U4.4 | length 36.4
  Top Layer w0.254: SW4.2@196.5,28 196.479,27.979 196.479,25.57 196.502,25.547 196.502,24.903 196.479,24.88 196.479,17.11 197.7,15.889 v1(197.7,10.1)
  Bottom Layer w0.254: U4.4@183.4,10.125 183.412,10.113 197.687,10.113 v1(197.7,10.1) ; SW4.2@196.5,28 196.62,28 199.035,30.415 R164.1@199.035,30.55
BTN-RUNSTOP: SW18.2 U3.10 | length 27
  Top Layer w0.254: v1(175,-5) 180.825,-5 v1(181.575,-4.25)
  Bottom Layer w0.254: SW18.2@158.75,-2.25 158.75,-2.5 162.164,-5.914 172.737,-5.914 173.678,-4.973 174.973,-4.973 v1(175,-5) ; v1(181.575,-4.25) 181.587,-4.262 183.387,-4.262 U3.10@183.4,-4.275
BTN-SETUP: SW14.4 U4.5 | length 198.7
  Top Layer w0.254: SW14.4@21.751,2.284 23.5,0.535 v1(23.5,-8)
  Bottom Layer w0.254: v1(23.5,-8) 25.5,-10 184.71,-10 185.534,-10 187.954,-7.58 187.954,-3.062 187.473,-2.581 187.473,-0.377 188.825,0.975 188.825,6.274 185.624,9.475 U4.5@183.4,9.475
BTN-TRCNT: U4.6
BTN-TRSEL: SW19.1 U3.7 | length 12
  Top Layer w0.254: SW19.1@173.25,2.25 175.6,-0.1 180.1,-0.1 v1(181.75,-1.75)
  Bottom Layer w0.254: v1(181.75,-1.75) 182.325,-2.325 U3.7@183.4,-2.325
BTN-VMAXDN: SW15.2 U3.15 | length 77.2
  Bottom Layer w0.254: SW15.2@110.751,-2.241 SW15.2@110.75,-2.25 112.046,-3.546 122.312,-3.546 125.189,-0.669 127.405,-0.669 134.466,-7.73 178.27,-7.73 179,-7 179,-4.534 178.741,-4.275 U3.15@177.6,-4.275
BTN-VMAXUP: SW8.1 U3.16 | length 104.3
  Top Layer w0.254: v1(102,-1.5) 102,11.508 SW8.1@104.251,13.759
  Bottom Layer w0.254: v1(102,-1.5) 102,-1.594 104.406,-4 122.5,-4 125.377,-1.123 127.217,-1.123 134.278,-8.184 178.458,-8.184 179.454,-7.188 179.454,-4.346 178.733,-3.625 U3.16@177.6,-3.625
F-KEYINT-A: J1.8 R159.1 U3.1 | length 45.7
  Top Layer w0.254: v1(186,3) 186,7.306 186.944,8.251 186.944,13.194 193.25,19.5 193.25,23.532 194.943,25.225 v1(195.725,25.225)
  Layer 2 w0.254: v1(190.2,32.075) 195.725,26.55 v1(195.725,25.225)
  Bottom Layer w0.254: U3.1@183.4,1.575 184.575,1.575 v1(186,3) ; J1.8@190.19,38.73 R159.1@190.19,33.5 190.195,33.495 190.195,32.08 v1(190.2,32.075)
F-KEYINT-B: J1.10 R160.1 U4.1 | length 67.8
  Top Layer w0.254: v1(188.679,12.45) 188.679,10.724 190.903,8.5 198.932,8.5 202.546,12.114 202.546,26.221 206.4,30.075 206.4,33.957 204.807,35.55 195.91,35.55 J1.10@192.73,38.73
  Bottom Layer w0.254: U4.1@183.4,12.075 184.75,12.075 185.175,12.5 188.629,12.5 v1(188.679,12.45) ; J1.10@192.73,38.73 192.77,38.69 192.77,33.54 R160.1@192.81,33.5
F-LCD4: DISP1.11 J1.11 | length 214.9
  Layer 1 w0.254: DISP1.11@-3.742,41.317 -2.808,42.251 -2.354,42.251 -0.478,44.126 -0.478,52.197 2.146,54.821 177.411,54.821 189.186,43.046 193.494,43.046 J1.11@195.27,41.27
F-LCD5: DISP1.12 J1.13 | length 220.4
  Layer 1 w0.254: DISP1.12@-6.282,41.317 -6.015,41.584 -5.104,41.584 -3.983,42.705 -2.612,42.705 -0.932,44.385 -0.932,52.385 1.958,55.275 177.779,55.275 189.554,43.5 195.58,43.5 J1.13@197.81,41.27
F-LCD6: DISP1.13 J1.15 | length 218.1
  Top Layer w0.254: DISP1.13@-3.742,43.857 -2.834,44.765 -1.265,44.765 -0.708,45.322 -0.708,51.967 2.146,54.821 177.411,54.821 189.186,43.046 198.574,43.046 J1.15@200.35,41.27
F-LCD7: DISP1.14 J1.17 | length 223.6
  Top Layer w0.254: DISP1.14@-6.282,43.857 -5.017,45.121 -3.119,45.121 -3.022,45.219 -1.524,45.219 -1.162,45.581 -1.162,52.155 1.958,55.275 177.779,55.275 189.554,43.5 200.66,43.5 J1.17@202.89,41.27
F-LCDE: DISP1.6 J1.9 | length 223.4
  Bottom Layer w0.254: DISP1.6@-6.282,33.697 -6.015,33.964 -5.104,33.964 -4.068,35 -1.765,35 -1.616,35.149 -1.616,50.276 -1.616,51.701 1.958,55.275 3.383,55.275 177.779,55.275 191.599,41.455 192.545,41.455 J1.9@192.73,41.27
F-LCDRS: DISP1.4 J1.5 | length 221.9
  Bottom Layer w0.254: DISP1.4@-6.282,31.157 -6.015,31.424 -5.104,31.424 -4.219,32.309 -2.191,32.309 -1.162,33.338 -1.162,51.513 2.146,54.821 177.411,54.821 187.599,44.633 187.599,41.321 J1.5@187.65,41.27
F-POWERON: J1.3 SW3.3 | length 249.3
  Top Layer w0.254: SW3.3@-3.249,2.25 -5.25,4.251 -5.25,14 -0.55,18.7 v1(-0.5,18.7)
  Layer 2 w0.254: v1(-0.5,18.7) -1.5,19.7 -1.5,51.175 2.146,54.821 177.411,54.821 185.11,47.122 J1.3@185.11,41.27
F-SCL: J1.4 R29.1 U1.22 U2.22 U3.22 U4.22 | length 59.7
  Layer 2 w0.254: v1(179.525,0.75) 179.525,2.257 179.082,2.7 179.082,9.582 179.4,9.9 179.4,10.951 179.273,11.078 179.273,21.373 179.963,22.062 v2(180,22.1) ; v2@179.925,22.1 179.925,22.175 179.248,22.852 179.248,28.873 179.425,29.05 v2(179.425,29.225) 185.11,34.91 J1.4@185.11,38.73
  Bottom Layer w0.254: U3.22@177.6,0.275 178.875,0.275 179.35,0.75 v1(179.525,0.75) 180.525,0.75 180.648,0.873 181.095,0.873 181.55,1.328 181.55,1.775 182.55,2.775 183.987,2.775 185.537,4.325 R29.1@186.31,4.325 ; U4.22@177.6,10.775 U4.22@177.6,10.775 178.701,10.774 v2(179.4,10.075) ; U2.22@177.6,20.775 178.725,20.775 180,22.05 v2(180,22.1) ; U1.22@177.6,30.275 178.975,30.275 179.425,29.825 v2(179.425,29.225)
F-SDA: J1.6 R30.1 U1.23 U2.23 U3.23 U4.23 | length 63.4
  Layer 2 w0.254: v2(180.025,23.375) 180.777,22.623 180.777,21.754 180.05,21.027 v2(180.05,11.4) 180.05,10.524 180.177,10.397 180.177,2.247 v2(180.773,1.65)
  Bottom Layer w0.254: U3.23@177.6,0.925 178.601,0.925 179.326,1.65 v2(180.773,1.65) 182.402,3.279 183.849,3.279 186.31,5.74 R30.1@186.31,5.875 ; U4.23@177.6,11.425 177.612,11.413 180.037,11.413 v2(180.05,11.4) ; U2.23@177.6,21.425 177.612,21.437 178.512,21.437 178.973,21.898 178.973,22.323 v2(180.025,23.375) 180.025,26.898 180.202,27.075 180.202,30.423 179.75,30.875 179.276,30.875 178.9,31.25 ; U1.23@177.6,30.925 178.575,30.925 178.9,31.25 ; J1.6@187.65,38.73 184.92,36 180.3,36 178.9,34.6 178.9,31.25
FGND: C1.2 C2.2 C3.2 C4.2 C5.2 C6.2 C7.2 C8.2 C9.2 C10.2 C11.2 C12.2 C13.2 C14.2 C15.2 D40.1 D47.1 DISP1.1 DISP1.5 J1.19 J1.20 pad.11 pad.12@9.5,-4 pad.12@45.5,8 pad.12@63.251,0 pad.12@134,8 pad.12@208,51 pad.12@208,-4 Q1.2 Q2.2 Q3.2 R3.2 R5.2 R157.2 R158.2 R161.1 SW1.4 SW2.2 SW3.2 SW4.1 SW4.C SW5.4 SW6.3 SW7.2 SW8.4 SW9.4 SW10.4 SW11.4 SW12.2 SW14.1 SW15.3 SW16.3 SW17.3 SW18.3 SW19.4 SW20.2 U1.12 U1.21 U2.12 U3.2 U3.12 U3.21 U4.2 U4.12 U5.1 U6.1 | length 57.3
  Top Layer w0.2: v2(178.471,23.25) v2@178.625,23.25
  Bottom Layer w0.2: C6.2@177.39,23.275 178.446,23.275 v2(178.471,23.25) ; v2(206.475,22.825) Q2.2@206.475,24.175 ; C13.2@215.425,16.15 215.66,16.385 C15.2@217.3,16.385 217.3,15.125 v2(217.325,15.1) ; C12.2@221.5,16.1 221.76,16.36 C14.2@223.375,16.36 v2@223.375,15.1
  Bottom Layer w0.3: R161.1@0.9,7.41 1.035,7.41 1.758,6.687 2.313,6.687 SW12.2@3.25,5.75 ; R3.2@6.45,1.91 13.515,1.91 13.95,1.475 13.95,-0.95 SW14.1@15.25,-2.25 ; Q1.2@20.075,10.775 21.125,10.775 21.65,10.25 v1(21.65,9.45) ; v1(172.175,12.65) 173.502,12.65 C11.2@173.504,12.648 ; v1@173.121,18.804 v1(173.125,18.8) 173.163,18.762 174.587,18.762 C7.2@174.625,18.725 ; v1(174.125,29.45) 174.925,30.25 175.981,30.25 176.558,29.673 177.552,29.673 U1.21@177.6,29.625 ; C9.2@175.49,5.04 175.525,5.075 v1(175.525,6.3) ; C5.2@175.807,34.95 v1@175.807,36.088 ; U3.21@177.6,-0.375 178.875,-0.375 179.525,-1.025 v1(179.525,-1.05) 180.971,0.396 181.293,0.396 181.773,0.877 183.352,0.877 U3.2@183.4,0.925 ; C4.2@177.737,34.4 177.737,35.538 v1(177.748,35.55) ; C8.2@180.017,3.301 v1@181.074,3.301 ; v1(181.75,4.925) U4.12@183.4,4.925 ; U3.12@183.4,-5.575 v1(185.075,-5.575) ; U4.2@183.4,11.425 182.225,11.425 181.69,11.96 C10.2@181.69,13.5 181.595,13.595 181.595,14.83 v1(181.5,14.925) U2.12@183.4,14.925 ; U1.12@183.4,24.425 184.55,24.425 185.05,23.925 v1(185.05,23.825)
  other v1: 177.5,-6.75 170.6,-5.125 155.525,-2.25 139.725,-2.225 181.075,3.3 147.9,5.175 164.575,10.35 189.8,11.05 154.575,13.475 161.575,13.775 186.825,15.925 5.325,17.75 175.818,36.1
  other v2: 223.4,15.075